# Altium PCB ucExpandido.PcbDoc
Units mil, origin at the board's own origin, x right, y up, seen from the top; angles counter-clockwise.
Board outline 2225 x 1250 mil, 2 copper layers (Top Layer, Bottom Layer), stack 65.792 mil thick; 17 components, 29 nets, 85 pads, 0 vias.
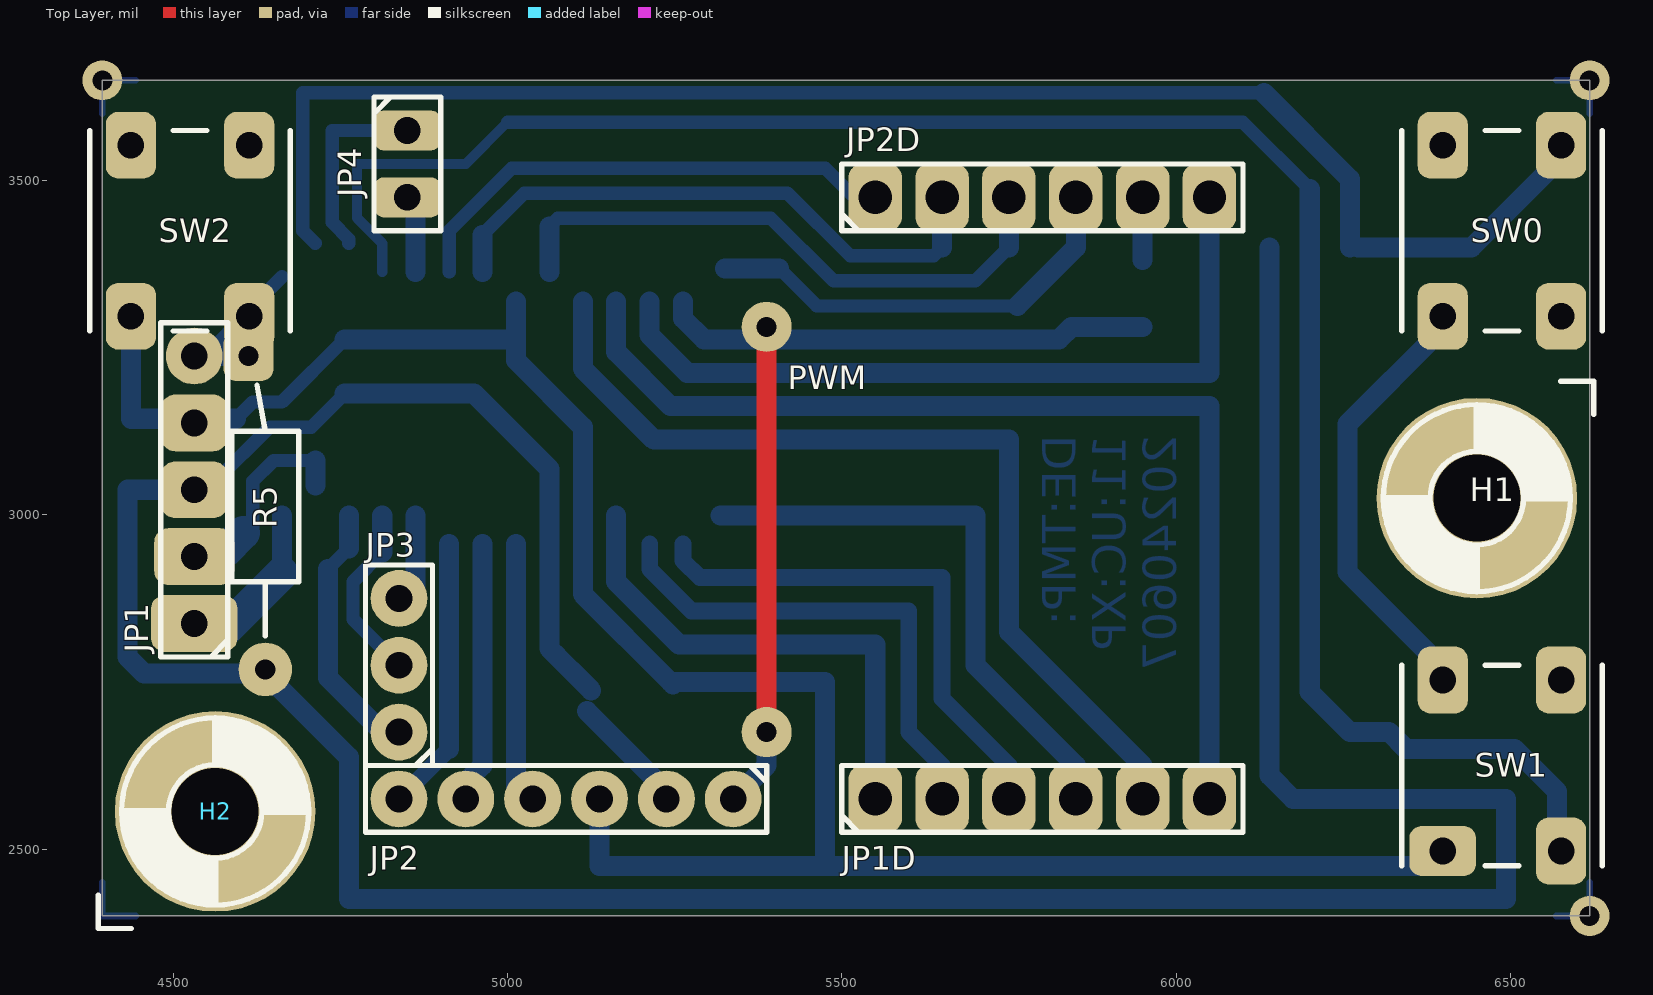
[diagram p0: Top Layer view]
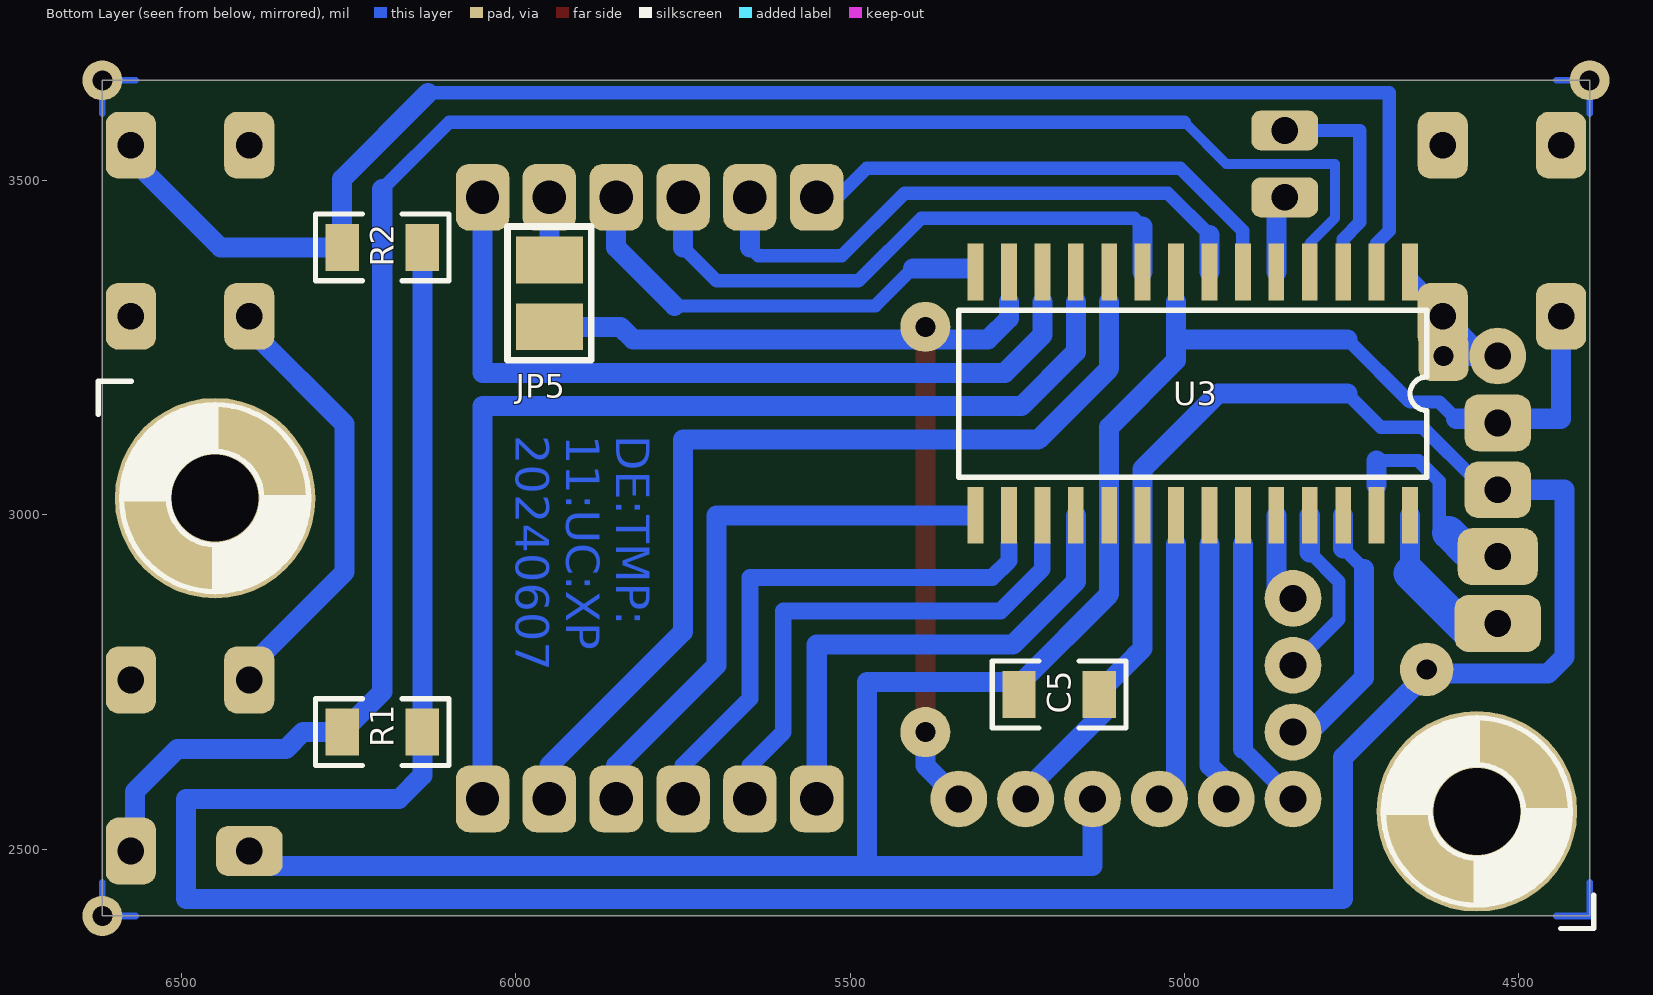
[diagram p1: Bottom Layer view, seen from below]
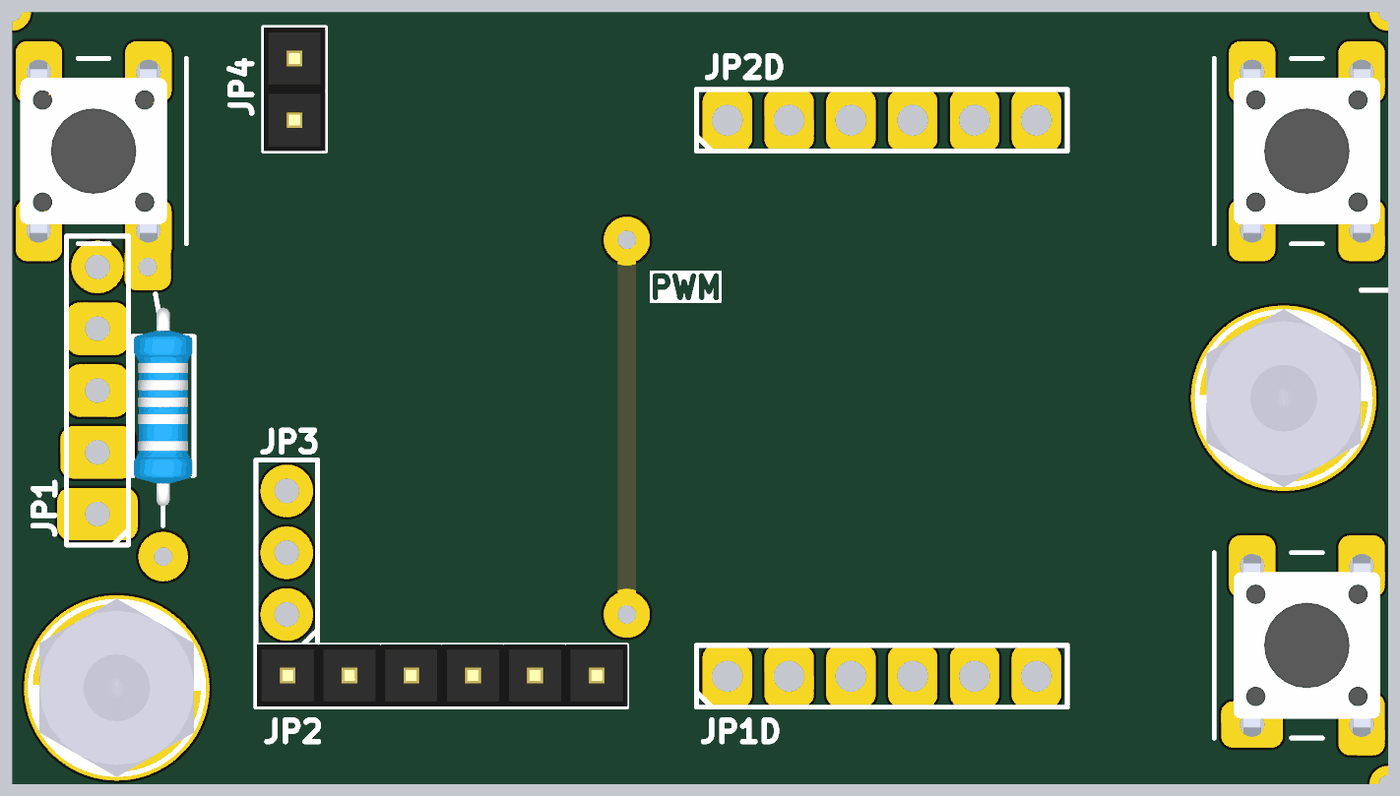
[diagram p2: 3D render of the assembled board from above, using the file's embedded part models]
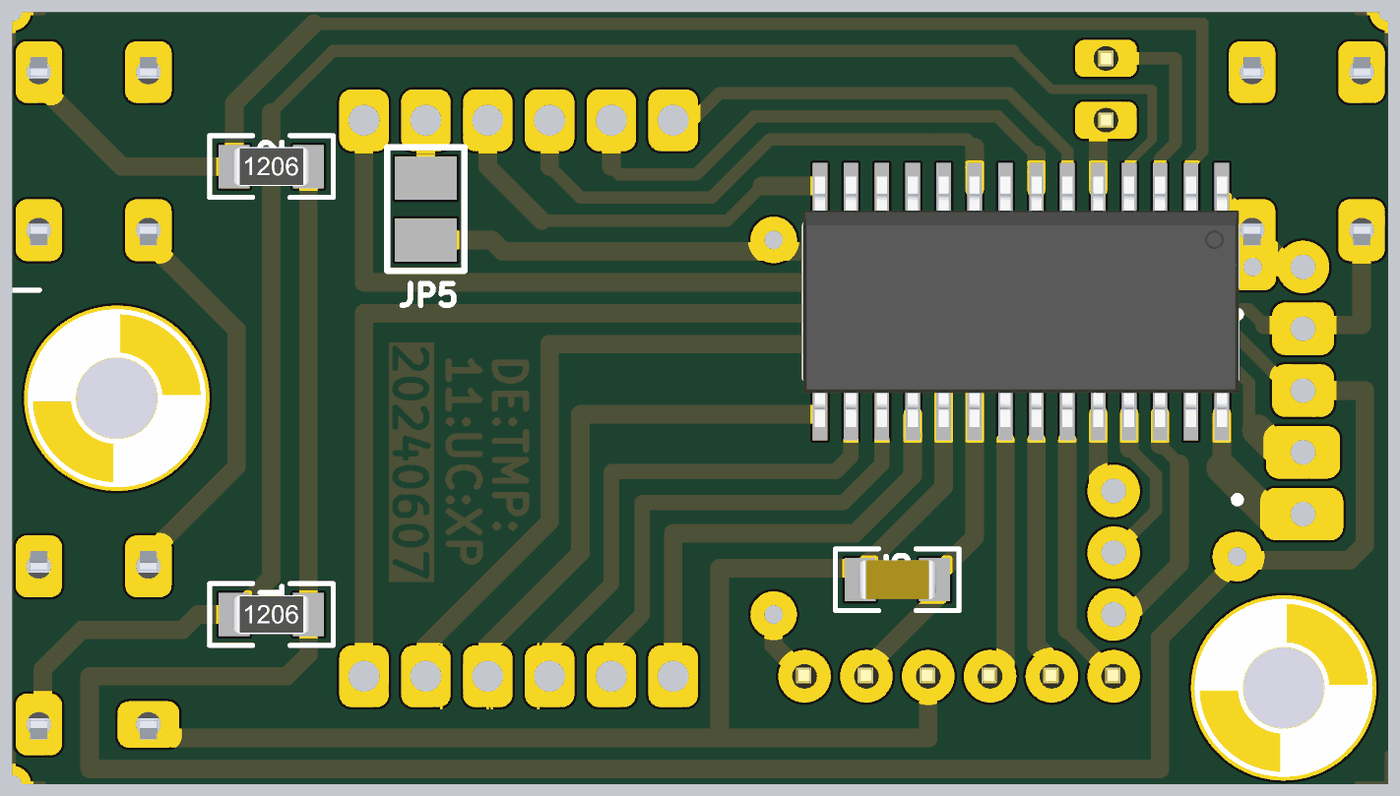
[diagram p3: 3D render of the assembled board from below, using the file's embedded part models]

## Layer stack, top to bottom
Top Layer: signal copper 1.4
Dielectric: core 62.9921, FR-4, Dk 4.8
Bottom Layer: signal copper 1.4

## Board outline
4393.75,2400 6618.75,2400 6618.75,3650 4393.75,3650

## Design rules (kind name [scope] priority, off if disabled: settings)
Clearance [All] p1: gap=12.5
PolygonConnect [All] p1: connectstyle=Relief reliefconductorwidth=20 reliefentries=4 polygonreliefangle="90 Angle"
RoutingVias [All] p1: holewidth=28 width=50 viastyle="Through Hole" minholewidth=28 minwidth=50 maxholewidth=28 maxwidth=50
SilkscreenOverComponentPads [All] p1: minsilkscreentomaskgap=10
SolderMaskExpansion [All] p1: expansion=4
Width [All] p1: maxlimit=100 minlimit=10 preferedwidth=20
27 further rules are at their usual default settings.

## Components (designator, comment, footprint, x,y, rotation, side; value= is the part's Value field where it differs from the comment)
C5 "Capacitor 1206; 100nF; 50V" C1206 5187.5,2731.25 r0 bottom
H1 "Agujero de montaje" AGUJERO_TAMECO_30MM 6450,3025 r0 top
H2 "Agujero de montaje" AGUJERO_TAMECO_30MM 4562.5,2556.25 r180 top
JP1 "Header5x1" HDR5x1 4531.25,2837.5 r90 top
JP1D "Header6x1" HDR6x1#1 5550,2575 r0 top
JP2 "Header6x1" HDR6x1#2 5337.5,2575 r180 top
JP2D "Header6x1" HDR6x1#1 5550,3475 r0 top
JP3 "Header3x1" HDR3x1 4837.5,2675 r90 top
JP4 "Header2x1" HDR2x1 4850,3575 r270 top
JP5 "Jumper 2 contactos; Soldadura" JUMPER2 5950,3331.25 r270 bottom
R1 "Resistencia 1206; 100Kohm" R1206 6200,2675 r180 bottom
R2 "Resistencia 1206; 100Kohm" R1206 6200,3400 r180 bottom
R5 "Resistencia 1206; 10Kohm" RES300th 4637.5,3012.5 r270 top
SW0 "SWITCH" SW_T_5MM#1 6487.5,3425 r90 top
SW1 "SW_T_5MM" SW_T_5MM#2 6487.5,2625 r90 top
SW2 "SW_T_5MM" SW_T_5MM#1 4525,3425 r90 top (schematic designator SW0)
U3 "PIC16F883-I/SP" SOIC28 4887.5,3181.25 r0 bottom

## Footprints (in the part's own frame and the unit in brackets; to place one, negate y for a bottom-side part, rotate by r counter-clockwise, add the part's x,y. Pads: shape width x height; smd on the part's side, far side on the other; paste and mask are expansions set on the pad)
AGUJERO_TAMECO_30MM [mil] "AGUJERO DE MONTAJE"
  round 300 hole 130: 1(0,0)
  silkscreen extent -140,-140 175,175, body extent -125,-144 125,144, height 1181
C1206 [mil]
  rect 50x70 smd: 1(-60,0) 2(60,0)
  silkscreen extent -100,-50 100,50, body extent -63,-31 63,31, height 33
HDR2x1 [mil] "HEADER 2x1"
  rrect50% 60x100 hole 40: 1(0,0) 2(100,0)
  silkscreen extent -50,-50 150,50, body extent -50,-50 150,50, height 336
HDR3x1 [mil] "HEADER 3x1"
  round 85 hole 40: 1(0,0) 2(100,0) 3(200,0)
  silkscreen extent -50,-50 250,50
HDR5x1 [mil] "HEADER 5x1"
  rrect50% 85x130 hole 40: 1(0,0)
  rrect50% 85x120 hole 40: 2(100,0)
  rrect50% 85x100 hole 40: 3(200,0) 4(300,0)
  round 85 hole 40: 5(400,0)
  silkscreen extent -50,-50 450,50
HDR6x1#1 [mil] "HEADER 6x1"
  rrect50% 80x100 hole 50: 1(0,0) 2(100,0) 3(200,0) 4(300,0) 5(400,0) 6(500,0)
  silkscreen extent -50,-50 550,50
HDR6x1#2 [mil] "HEADER 6x1"
  round 85 hole 40: 1(0,0) 2(100,0) 3(200,0) 4(300,0) 5(400,0) 6(500,0)
  silkscreen extent -50,-50 550,50, body extent -51,-51 549,49, height 336
JUMPER2 [mil]
  rect 70x100 smd: 1(-50,0) 2(50,0)
  silkscreen extent -100,-63 100,63
R1206 [mil]
  rect 50x70 smd: 1(-60,0) 2(60,0)
  silkscreen extent -100,-50 100,50, body extent -63,-31 63,31, height 34
RES300th [mil] "RESISTENCIA THROUGH-HOLE"
  rrect50% 75x75 hole 30: 1(-225,-25)
  round 80 hole 30: 2(243.75,0)
  silkscreen extent -113,-50 113,50, body extent -159,-47 162,47, height 98
SOIC28 [mm]
  rect 0.6x2.15 smd: 1(-5.715,-4.625) 2(-4.445,-4.625) 3(-3.175,-4.625) 4(-1.905,-4.625) 5(-0.635,-4.625) 6(0.635,-4.625) 7(1.905,-4.625) 8(3.175,-4.625) 9(4.445,-4.625) 10(5.715,-4.625) 11(6.985,-4.625) 12(8.255,-4.625) 13(9.525,-4.625) 14(10.795,-4.625) 15(10.795,4.625) 16(9.525,4.625) 17(8.255,4.625) 18(6.985,4.625) 19(5.715,4.625) 20(4.445,4.625) 21(3.175,4.625) 22(1.905,4.625) 23(0.635,4.625) 24(-0.635,4.625) 25(-1.905,4.625) 26(-3.175,4.625) 27(-4.445,4.625) 28(-5.715,4.625)
  silkscreen extent -6.35,-3.17 11.43,3.17, body extent -6.41,-5.15 11.49,5.15, height 2.65
SW_T_5MM#1 [mm] "PULSADOR DE 2 CONTACTOS, 4 TERMINALES"
  rrect50% 2.54x1.905 hole 1.016: 1(3.25,-2.25) 2(3.25,2.25) 3(-3.25,-2.25) 4(-3.25,2.25)
  silkscreen extent -3.81,-3.81 3.81,3.81, body extent -3.87,-3.01 3.87,3.02, height 5.01
SW_T_5MM#2 [mm] "PULSADOR DE 2 CONTACTOS, 4 TERMINALES"
  rrect50% 2.54x1.905 hole 1.016: 1(3.25,-2.25) 2(3.25,2.25) 3(-3.25,-2.25)
  rrect50% 1.905x2.54 hole 1.016: 4(-3.25,2.25)
  silkscreen extent -3.81,-3.81 3.81,3.81, body extent -3.87,-3.01 3.87,3.02, height 5.01

## Part data
JP1: "Header 5x1"
JP1D JP2 JP2D: "Header 6x1"
JP3: "Header 3x1"
JP4: "Header 2x1"
SW0: library part SW_T_5MM, "SW_T_5MM"

## Free pads (board coordinates)
  round 60 hole 30: 0(4393.75,3650) 1(6618.75,2400) 2(6618.75,3650)
  round 75 hole 30: 0(5387.5,3281.25) 1(5387.5,2675)

## Nets (pads, with @x,y where several pads share a name; then routed paths per layer and width w, separated by ;. In a path a pad name is that pad's centre, name@x,y a point inside that pad or via, vN(x,y) a via of type N, cw(c..) or ccw(c..) an arc to the next point about the centre after c; other vN are vias at no path point)
A: JP2D.2 U3.7 | length 856.6
  Bottom Layer w20: 4962.5,3418.75 5025,3481.25 5418.75,3481.25 5512.5,3387.5 5637.5,3387.5 5650,3400
  Bottom Layer w30: U3.7 4962.5,3418.75 ; 5650,3400 JP2D.2@5650,3443.75
AN0: JP2D.6 U3.12 | length 1142
  Bottom Layer w30: 5212.5,3318.75 5212.5,3268.75 5268.75,3212.5 6050,3212.5 JP2D.6@6050,3443.75
AN1: JP2D.1 U3.6 | length 769.1
  Bottom Layer w20: U3.6 4912.5,3425 5006.25,3518.75 5475,3518.75 JP2D.1@5550,3443.75
AN2: JP1D.6 U3.11 | length 1583.7
  Bottom Layer w30: 5162.5,3318.75 5162.5,3243.75 5243.75,3162.5 6050,3162.5 JP1D.6
AN3: JP1D.1 U3.18 | length 756.7
  Bottom Layer w30: U3.18 5162.5,2900 5256.25,2806.25 5550,2806.25 JP1D.1
B: JP2D.3 U3.9 | length 863.9
  Bottom Layer w20: 5062.5,3431.25 5075,3443.75 5393.75,3443.75 5487.5,3350 5700,3350 5750,3400
  Bottom Layer w30: U3.9 5062.5,3431.25 ; 5750,3400 JP2D.3@5750,3443.75
C: JP2D.4 U3.14 | length 628.3
  Bottom Layer w20: 5406.25,3368.75 5462.5,3312.5 5762.5,3312.5
  Bottom Layer w30: 5325,3368.75 5406.25,3368.75 ; 5762.5,3312.5 5850,3400 JP2D.4@5850,3443.75
D: JP1D.5 U3.10 | length 1401.9
  Bottom Layer w30: 5112.5,3318.75 5112.5,3218.75 5218.75,3112.5 5750,3112.5 5750,2825 5950,2625 JP1D.5
DP: JP2.1 JP5.2 pad.0@5387.5,3281.25 pad.1@5387.5,2675 U3.13 | length 1428.9
  Top Layer w30: pad.1@5387.5,2675 pad.0@5387.5,3250
  Bottom Layer w30: 5262.5,3318.75 5262.5,3293.75 5293.75,3262.5 5825,3262.5 5843.75,3281.25 JP5.2 ; JP2.1 5387.5,2625 pad.1@5387.5,2675
E: JP1D.4 U3.15 | length 867.5
  Bottom Layer w30: U3.15@5318.75,2999.16 5700,2999.16 5700,2775 5850,2625 JP1D.4
F: JP1D.2 U3.17 | length 752.8
  Bottom Layer w25: 5212.5,2956.25 5212.5,2918.75 5275,2856.25 5600,2856.25 5600,2675 5650,2625 JP1D.2
G: JP1D.3 U3.16 | length 795.5
  Bottom Layer w25: 5262.5,2956.25 5262.5,2931.25 5287.5,2906.25 5650,2906.25 5650,2725 5750,2625 JP1D.3
GND: C5.2 JP1.4 JP2.3 SW1.4 SW2.4 U3.8 U3.19 | length 3292.2
  Bottom Layer w20: 4593.75,3143.75 4618.75,3168.75 4662.5,3168.75 4756.25,3262.5
  Bottom Layer w30: SW2.4 4436.42,3143.75 4593.75,3143.75 ; 4756.25,3262.5 5012.5,3262.5 ; 5012.5,3318.75 5012.5,3262.5 ; JP2.3 5137.5,2475 SW1.4@6375,2475 ; C5.2@5247.5,2746.25 C5.2@5243.75,2750 ; 5475,2475 5475,2750 C5.2@5243.75,2750 ; 5012.5,3262.5 5012.5,3231.25 5112.5,3131.25 U3.19 5112.5,2881.25 C5.2@5243.75,2750
IN: JP2.4 U3.21 | length 393.8
  Bottom Layer w30: 5012.5,2956.25 5012.5,2925 5012.5,2575 JP2.4@5025,2575
MCLR: JP1.5 R5.1 SW2.3 U3.1 | length 266.7
  Bottom Layer w20: SW2.3@4625,3318.75 U3.1@4662.5,3356.25
  Bottom Layer w30: R5.1@4618.75,3237.5 JP1.5 4554.04,3237.5 SW2.3 SW2.3@4625,3312.5
NetJP2D_5: JP2D.5 JP5.1 | length 62.5
  Bottom Layer w30: JP5.1 JP2D.5@5950,3443.75
NetSW0_4: SW0.4 SW1.2 | length 607.1
  Bottom Layer w30: SW1.2@6392.67,2777.95 6256.25,2914.37 6256.25,3135.63 SW0.4@6392.67,3272.05
OUT: JP2.5 U3.22 | length 391.6
  Bottom Layer w30: JP2.5 4937.5,2600 4962.5,2625 4962.5,2956.25
PGC: JP1.2 U3.27 | length 306.2
  Bottom Layer w20: JP1.2@4550,2937.5 4562.5,2937.5 JP1.2@4576.56,2951.56 ; 4604.69,2979.69 4618.75,2975 4618.75,3050 4650,3081.25 4712.5,3081.25
  Bottom Layer w30: 4712.5,3043.75 4712.5,3081.25
  Bottom Layer w50: JP1.2@4576.56,2945.31 4604.69,2973.44
PGD: JP1.1 U3.28 | length 216.7
  Bottom Layer w30: 4662.5,2906.25 U3.28
  Bottom Layer w50: JP1.1@4575,2825 4662.5,2912.5
PUL0: R2.1 SW0.1 U3.2 | length 2305.2
  Bottom Layer w20: 4712.5,3406.25 4693.75,3425 4693.75,3631.25 4793.75,3631.25 6131.25,3631.25
  Bottom Layer w30: 6131.25,3631.25 6260,3502.5 R2.1 ; R2.1@6272.5,3400 6441.88,3400 SW0.1@6569.83,3527.95
PUL1: R1.1 SW1.3 U3.4 | length 2992.8
  Bottom Layer w15: U3.4 4812.5,3406.25 4775,3443.75 4775,3525 4937.5,3525 5000,3587.5 5050,3587.5
  Bottom Layer w20: 5000,3587.5 6100,3587.5 6200,3487.5
  Bottom Layer w30: 6200,3487.5 6200,2735 R1.1 6318.75,2675 6343.75,2650 6506.25,2650 6569.83,2586.42 SW1.3@6569.83,2497.05
PWMA: JP2.6 U3.23 | length 437.3
  Bottom Layer w25: JP2.6 4887.5,2625 4912.5,2650
  Bottom Layer w30: JP2.6 JP2.6@4837.5,2600 ; 4912.5,2650 4912.5,2862.5 4912.5,2887.5 4912.5,2956.25
RA1: JP4.1 U3.3 | length 291.6
  Bottom Layer w20: 4762.5,3406.25 4762.5,3412.5 4737.5,3437.5 4737.5,3575 JP4.1
RA3: JP4.2 U3.5 | length 105.4
  Bottom Layer w30: U3.5 JP4.2@4862.5,3468.75
RB3: JP3.3 U3.24 | length 165.8
  Bottom Layer w20: JP3.3 JP3.3@4862.5,2900
  Bottom Layer w30: JP3.3@4862.5,2868.75 U3.24
RB4: JP3.2 U3.25 | length 270.8
  Bottom Layer w20: 4812.5,2943.75 4768.75,2900 4768.75,2843.75 JP3.2
  Bottom Layer w30: 4812.5,2943.75 U3.25
RB5: JP3.1 U3.26 | length 395.8
  Bottom Layer w20: 4731.25,2918.75 4762.5,2950
  Bottom Layer w30: 4731.25,2918.75 4731.25,2756.25 4812.5,2675 JP3.1 ; 4762.5,2950 U3.26
VCC: C5.1 JP1.3 JP2.2 R1.2 R2.2 R5.2 U3.20 | length 5164.1
  Bottom Layer w20: JP1.3@4562.5,3050 4643.75,3131.25 4706.25,3131.25 4756.25,3181.25
  Bottom Layer w30: JP1.3 4431.25,3037.5 4431.25,2787.5 4456.25,2762.5 4637.5,2762.5 4762.5,2637.5 4762.5,2425 6493.75,2425 6493.75,2575 6175,2575 6140,2610 R2.2 ; 4756.25,3181.25 4950,3181.25 5062.5,3068.75 U3.20 5062.5,2800 ; 5075,2787.5 5062.5,2800 ; C5.1@5118.75,2706.25 JP2.2@5237.5,2587.5 ; C5.1@5125,2737.5 5062.5,2800 ; JP2.2 JP2.2@5237.5,2600
pads on no net: H1.1 H2.1 SW0.2 SW0.3 SW1.1 SW2.1 SW2.2
copper on no net: | length 400
  Bottom Layer w10: 4393.75,2450 4393.75,2400 4443.75,2400 ; 4393.75,3600 4393.75,3650 4443.75,3650 ; 6568.75,2400 6618.75,2400 6618.75,2450 ; 6568.75,3650 6618.75,3650 6618.75,3600

## Other copper
Bottom Layer:
  text "DE:TMP:" at 5850,3118.75 h50 r90
  text "11:UC:XP" at 5925,3118.75 h50 r90
  text "20240607" at 6000,3118.75 h50 r90

## Silkscreen, mask and mechanical layers (free items; w line width, h text height)
Top Overlay:
  lines w7.87: 4625,3193.75 4637.5,3125 ; 4637.5,2818.75 4637.5,2900
  text "PWM" at 5418.75,3187.5 h35
etiquetas:
  lines w10: 6600,3637.5 6600,3650
dimensionAux:
  lines w10: 4436.42,3297.05 4613.58,3552.95 ; 4436.42,3552.95 4613.58,3297.05 ; 4762.5,2375 4762.5,3675 ; 4787.5,2375 4787.5,3675 ; 6250,2375 6250,3675
borderPcb:
  the board outline again, w10
topOverlayAux:
  lines w10: 4787.5,2625 4887.5,2625 4887.5,2925 4787.5,2925 4787.5,2625
  text "RA1" at 4925,3550 h45
  text "RE3" at 4468.75,3456.25 h45
  text "RA3" at 4925,3456.25 h45
  text "RA0" at 6318.75,3362.5 h45 r90
  text "RE3 (MCLR)" at 4675,3218.75 h45
  text "GND" at 4600,3118.75 h45
  text "VCC" at 4606.25,3018.75 h45
  text "RB6" at 4606.25,2918.75 h45
  text "RB3" at 4912.5,2850 h45
  text "RB7" at 4606.25,2818.75 h45
  text "RB4" at 4912.5,2756.25 h45
  text "RB5" at 4912.5,2656.25 h45
  text "RA2" at 6318.75,2562.5 h45 r90
  text "RB2" at 4862.5,2387.5 h45 r90
  text "RB1" at 4962.5,2387.5 h45 r90
  text "RB0" at 5062.5,2387.5 h45 r90
  text "GND" at 5162.5,2387.5 h45 r90
  text "VCC" at 5262.5,2387.5 h45 r90
  text "RC2" at 5362.5,2387.5 h45 r90
  text "/DP" at 5431.25,2387.5 h45 r90

## Dimensions
6618.75,2400 to 6100,2525 on dimensionAux
6100,3525 to 6618.75,3650 on dimensionAux
4393.75,3650 to 4500,3575 on dimensionAux
6618.75,3650 to 6462.5,3575 on dimensionAux
6618.75,2400 to 6462.5,2475 on dimensionAux
6618.75,2400 to 4393.75,2400 on dimensionPcb
4393.75,2400 to 4393.75,3650 on dimensionPcb
6437.5,3250 to 6618.75,3650 on dimensionAux